# Altium PCB optoPCB.PcbDoc
Units mm, origin at the board's own origin, x right, y up, seen from the top; angles counter-clockwise.
Board outline 152.4 x 101.6 mm, 2 copper layers (Top Layer, Bottom Layer); 17 components, 9 nets, 35 pads, 2 vias.
Unrouted connection lines stored in the file: 21.
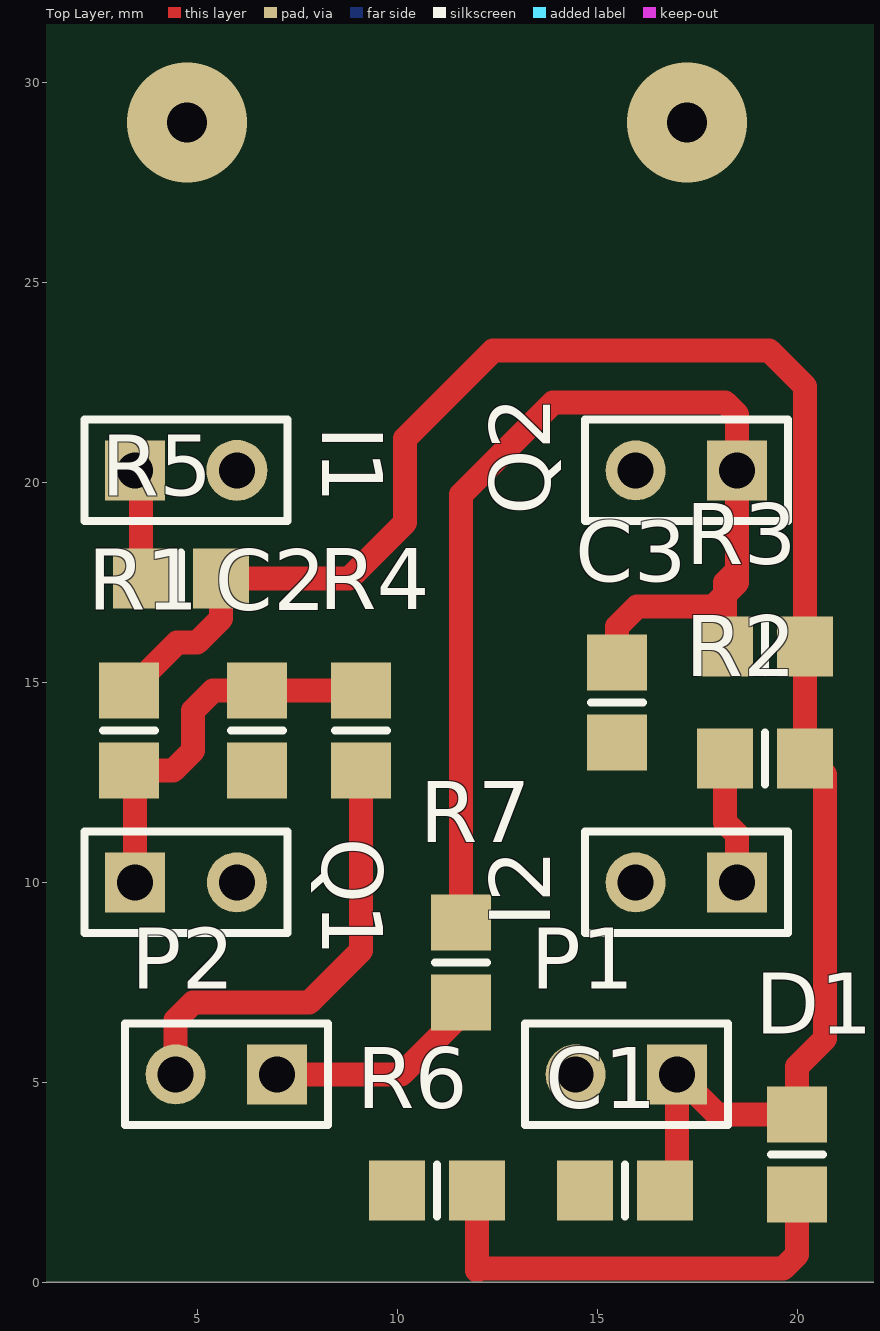
[diagram p0: Top Layer view]
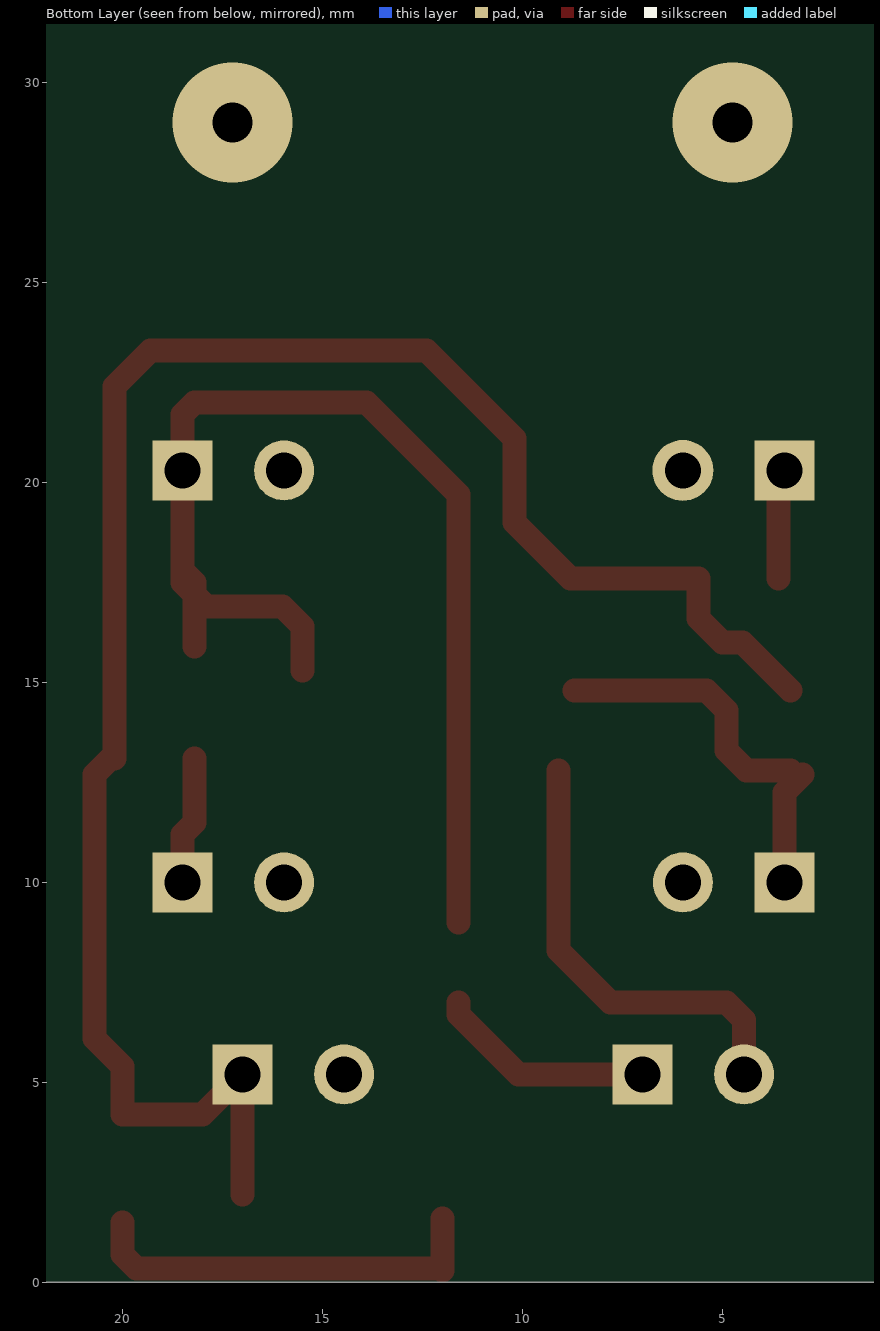
[diagram p1: Bottom Layer view, seen from below]

## Layer stack, top to bottom
Top Solder: solder mask 0.0102, Solder Resist, Dk 3.5
Top Layer: signal copper 0.0356
Dielectric 1: dielectric 0.32, FR-4, Dk 4.8
Bottom Layer: signal copper 0.0356
Bottom Solder: solder mask 0.0102, Solder Resist, Dk 3.5

## Board outline
0,0 152.4,0 152.4,101.6 0,101.6

## Design rules (kind name [scope] priority, off if disabled: settings)
Clearance [All] p1: gap=0.8 ignorepadtopadclearanceinfootprint=FALSE
PolygonConnect [All] p1: connectstyle=Relief reliefconductorwidth=0.254 reliefentries=4 polygonreliefangle="90 Angle" airgapwidth=0.254
RoutingVias [All] p1: holewidth=0.711 width=1.27 viastyle="Through Hole" minholewidth=0.711 minwidth=1.27 maxholewidth=0.711 maxwidth=1.27
SolderMaskExpansion [All] p1: expansion=0.102
Width [All] p1: maxlimit=0.254 minlimit=0.254 preferedwidth=0.254
30 further rules are at their usual default settings.

## Components (designator, comment, footprint, x,y, rotation, side; value= is the part's Value field where it differs from the comment)
C1 "Cap" 6-0805_M 15.7,2.3 r180 top value=100nf
C2 "Cap" 6-0805_M 6.5,13.8 r90 top value=100nf
C3 "Cap" 6-0805_M 15.5,14.5 r270 top value=100nf
D1 "LED1" 6-0805_M 20,3.2 r270 top
I1 "ir2" hdr1x2 3.45,20.3 r0 top locked
I2 "ir1" HDR1X2 18.5,10 r180 top locked
P1 "Header 2" HDR1X2 17,5.2 r180 top
P2 "Header 2" HDR1X2 7,5.2 r180 top
Q1 "Photo NPN" HDR1X2 3.45,10 r0 top locked
Q2 "Photo NPN" HDR1X2 18.5,20.3 r180 top locked
R1 "Res1" 6-0805_M 3.3,13.8 r270 top value=10k
R2 "Res1" 6-0805_M 19.2,13.1 r0 top value=470
R3 "Res1" 6-0805_M 19.2,15.9 r180 top value=10k
R4 "Res1" 6-0805_M 9.1,13.8 r90 top value=100
R5 "Res1" 6-0805_M 4.6,17.6 r180 top value=470
R6 "Res1" 6-0805_M 11,2.3 r180 top value=10k
R7 "Res1" 6-0805_M 11.6,8 r270 top value=100

## Footprints (in the part's own frame and the unit in brackets; to place one, negate y for a bottom-side part, rotate by r counter-clockwise, add the part's x,y. Pads: shape width x height; smd on the part's side, far side on the other; paste and mask are expansions set on the pad)
6-0805_M [mm] "Chip Resistor, Body 2.0x1.2mm, IPC Low Density"
  rect 1.4x1.5 smd: 1(-1,0) 2(1,0)
  silkscreen extent 0,-0.65 0,0.65, body extent -1.07,-0.7 1.07,0.7, height 0.7
hdr1x2 [mm] "Connector; Header; 2 Position"
  rect 1.5x1.5 hole 0.9: 1(0,0)
  round 1.5 hole 0.9: 2(2.54,0)
  silkscreen extent -1.27,-1.27 3.81,1.27
HDR1X2 [mm] "Connector; Header; 2 Position"
  rect 1.5x1.5 hole 0.9: 1(0,0)
  round 1.5 hole 0.9: 2(2.54,0)
  silkscreen extent -1.27,-1.27 3.81,1.27

## Part data
C1 C2 C3: "Capacitor", LatestRevisionDate=17-Jul-2002, LatestRevisionNote="Re-released for DXP Platform.", PackageDescription="Radial Cap, Thru-Hole; 2 Leads; 0.3 in Pin Spacing", PackageReference=RAD-0.3, Published=8-Jun-2000, Publisher="Altium Limited"
D1: library part LED2, "Typical RED, GREEN, YELLOW, AMBER GaAs LED", LatestRevisionDate=17-Jul-2002, LatestRevisionNote="Re-released for DXP Platform.", PackageDescription="SM LED; 2 Flat Leads", PackageReference=3.2X1.6X1.1, PackageVersion=Feb-2002, Published=8-Jun-2000, Publisher="Altium Limited"
I1 I2: library part LED0, "Typical INFRARED GaAs LED", LatestRevisionDate=08-Jul-2005, LatestRevisionNote="Mech Layer 1 removed.", PackageDescription="LED; 2 Leads", PackageReference=LED-0, Published=8-Jun-2000, Publisher="Altium Limited"
P1 P2: "Header, 2-Pin", LatestRevisionDate=17-Jul-2002, LatestRevisionNote="Re-released for DXP Platform.", Publisher="Altium Limited"
Q1 Q2: library part "Header 2", "Header, 2-Pin", LatestRevisionDate=17-Jul-2002, LatestRevisionNote="Re-released for DXP Platform.", Publisher="Altium Limited"
R1 R2 R3 R4 R5 R6 R7: "Resistor", LatestRevisionDate=17-Jul-2002, LatestRevisionNote="Re-released for DXP Platform.", PackageDescription="Axial Device, Thru-Hole; 2 Leads; 0.3 in Pin Spacing", PackageReference=AXIAL-0.3, Published=8-Jun-2000, Publisher="Altium Limited"

## Free pads (board coordinates)
  round 1.524 hole 0.4: 13(5.99,20.3)

## Via types
v1: diameter 3, hole 1, Top Layer to Bottom Layer, 2 vias

## Nets (pads, with @x,y where several pads share a name; then routed paths per layer and width w, separated by ;. In a path a pad name is that pad's centre, name@x,y a point inside that pad or via, vN(x,y) a via of type N, cw(c..) or ccw(c..) an arc to the next point about the centre after c; other vN are vias at no path point)
GND: C1.2 C2.1 C3.2 I1.2 I2.2 P1.2 Q1.2 Q2.2 R6.2
NetC2_2: C2.2 Q1.1 R1.2 R4.2
NetC3_1: C3.1 Q2.1 R3.2 R7.1
NetD1_2: D1.2 R6.1
NetI1_1: I1.1 R5.2
NetI2_1: I2.1 R2.1
Out1: P2.1 R7.2
Out2: P2.2 R4.1
VCC: C1.1 D1.1 P1.1 R1.1 R2.2 R3.1 R5.1 | length 33.1
  Top Layer w0.6: R5.1 8.8,17.6 10.2,19 10.2,21.1 11.1,22 ; C1.1@17,2.2 P1.1@17,4.5 ; P1.1 18,4.2 D1.1 20,5.4 20.7,6.1 20.7,12.7 R2.2@20.2,13.2 ; R2.2 R2.2@20.2,13.2 ; 20.2,22.4 R3.1 R2.2@20.2,13.2
copper on no net: | length 87.1
  Top Layer w0.6: 3,12.7 3.45,12.25 3.45,10 ; 3.2,20.3 3.6,19.9 3.6,17.6 ; 3.3,12.8 4.4,12.8 4.9,13.3 4.9,14.3 5.4,14.8 6.5,14.8 ; 3.3,14.8 4.5,16 5,16 5.6,16.6 5.6,17.6 ; 4.46,5.2 4.46,6.56 4.9,7 7.8,7 9.1,8.3 9.1,12.8 ; 6.1,14.8 8.7,14.8 ; 7,5.2 10.1,5.2 11.6,6.7 11.6,7 ; 11.1,22 12.4,23.3 19.3,23.3 20.2,22.4 ; 11.6,9 11.6,19.7 13.9,22 18.2,22 18.5,21.7 18.5,20.3 18.5,17.5 17.9,16.9 16,16.9 15.5,16.4 15.5,15.3 ; 12,1.6 12,0.3 12.05,0.35 19.65,0.35 20,0.7 20,1.5 ; 18.2,10.3 18.5,10 18.5,11.2 18.2,11.5 18.2,13.1 ; 18.2,15.9 18.2,17.5 18.5,17.8
  other v1: 4.75,29 17.25,29